# Altium PCB correctCore.PcbDoc (part 1 of 2)
Units mil, origin at the board's own origin, x right, y up, seen from the top; angles counter-clockwise.
Board outline 4175 x 4095 mil, 4 copper layers (Top Layer, GND, PWR, Bottom Layer), stack 43.711 mil thick; 90 components, 157 nets, 637 pads, 408 vias.
Unrouted connection lines stored in the file: 2.
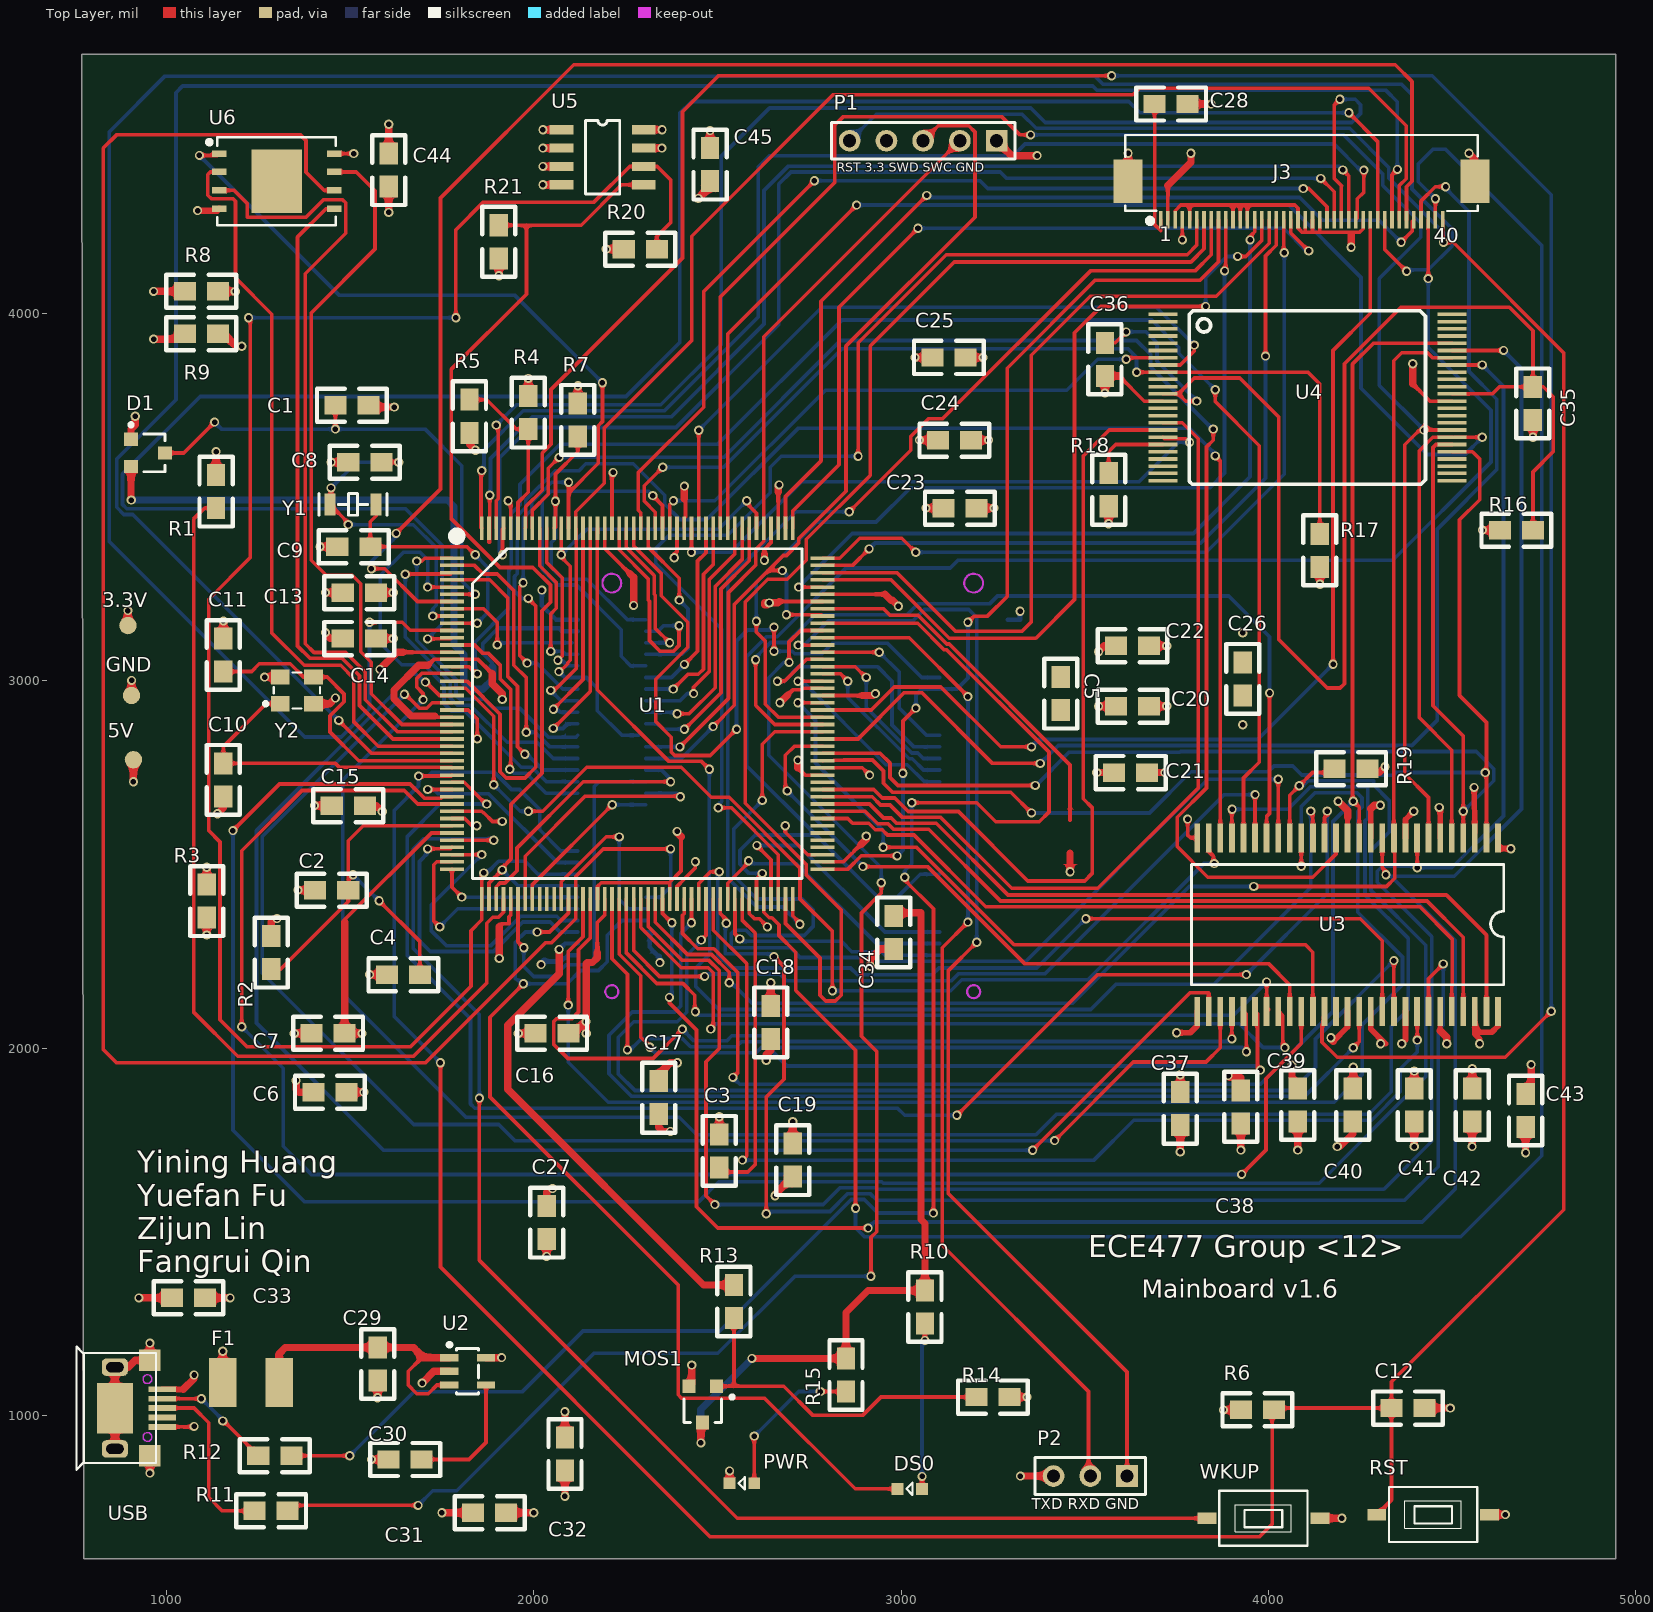
[diagram p0: Top Layer view]
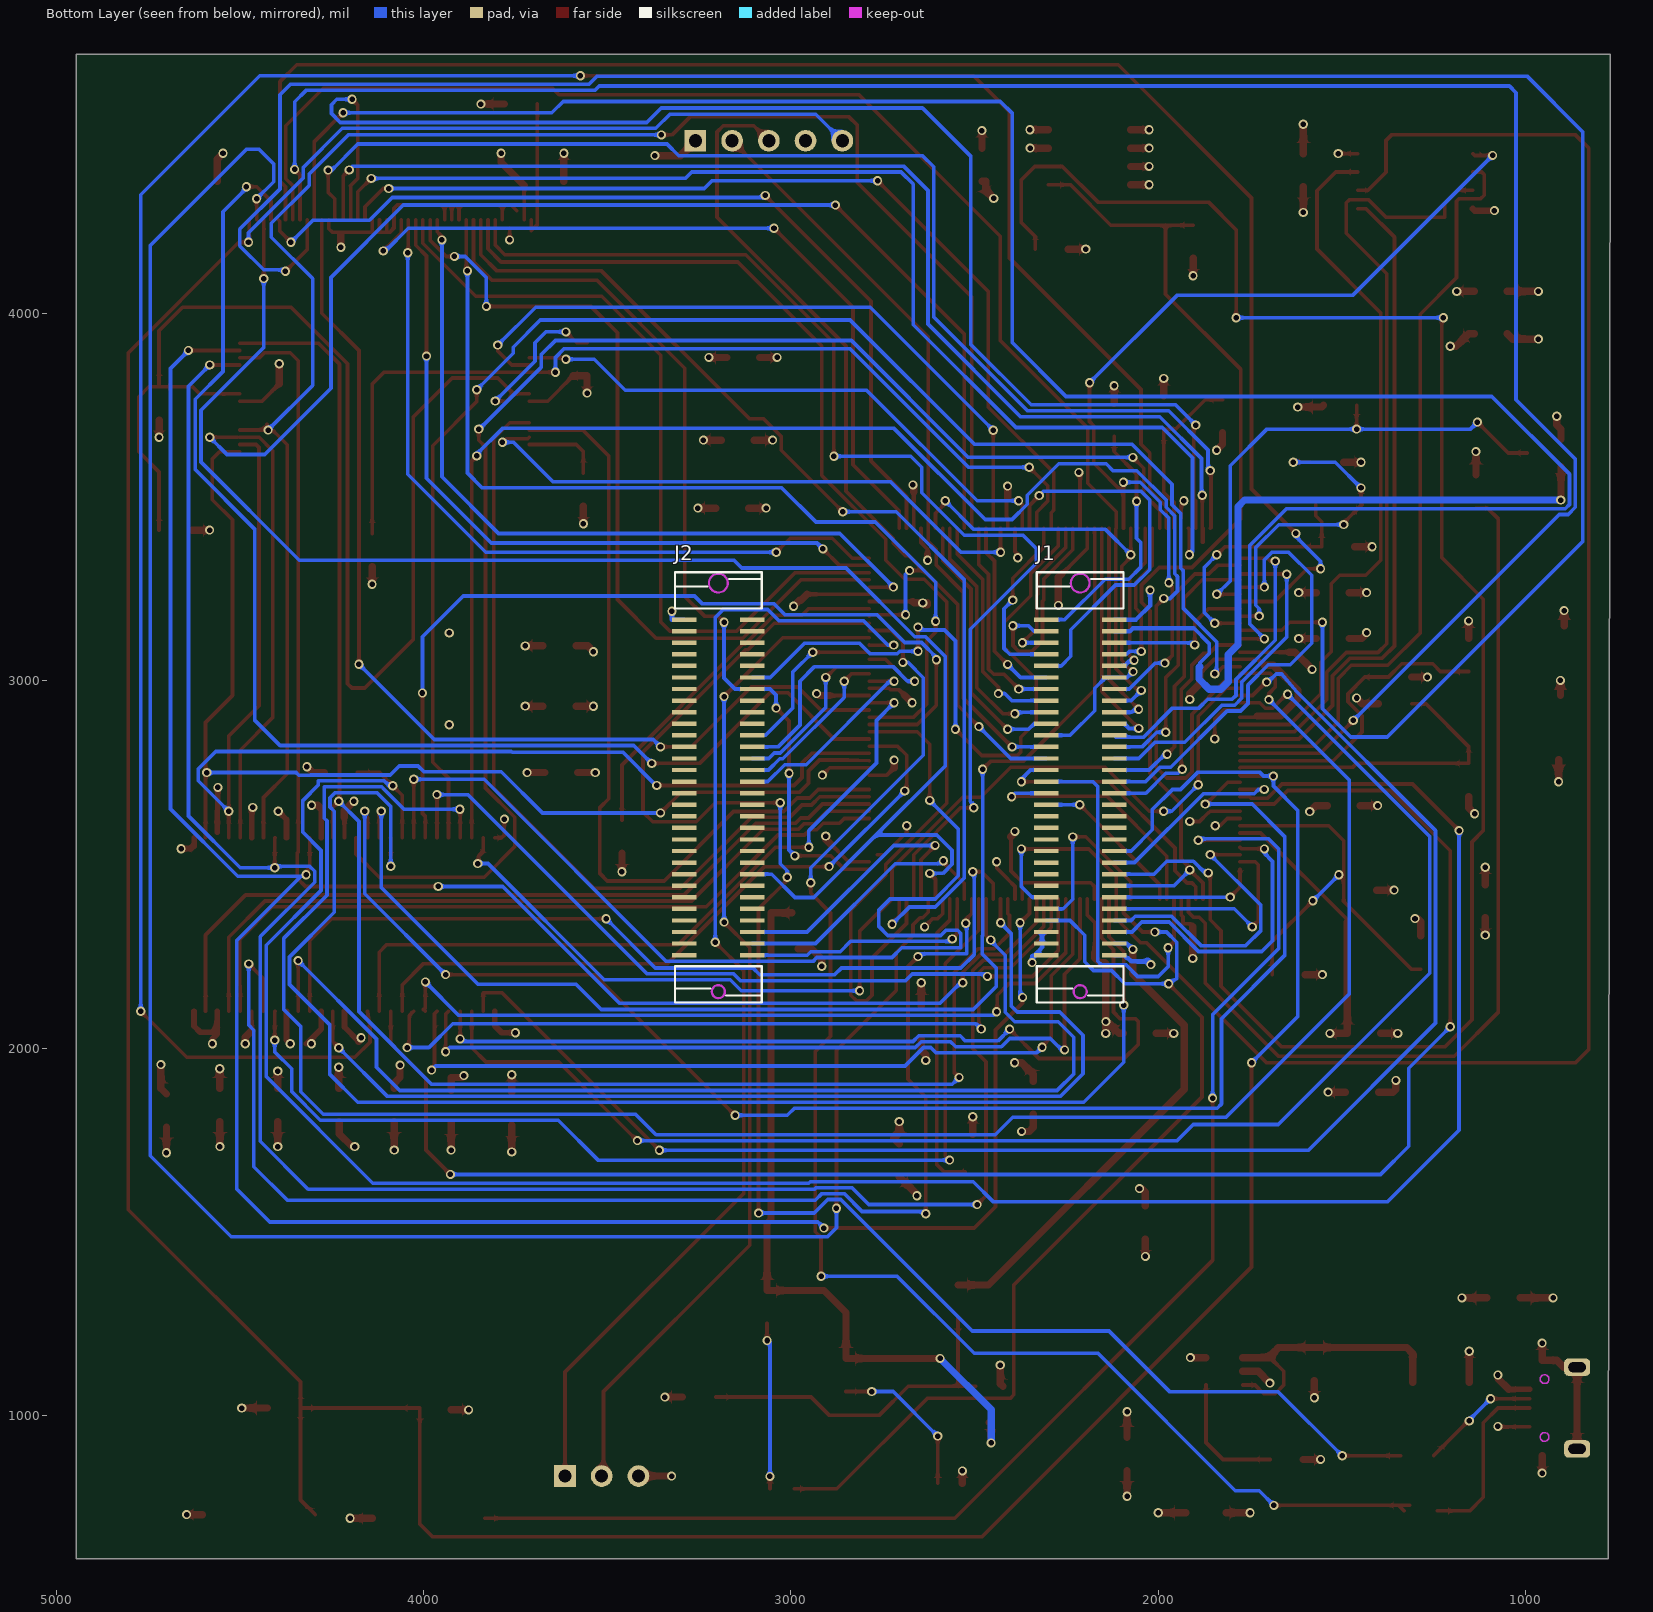
[diagram p1: Bottom Layer view, seen from below]
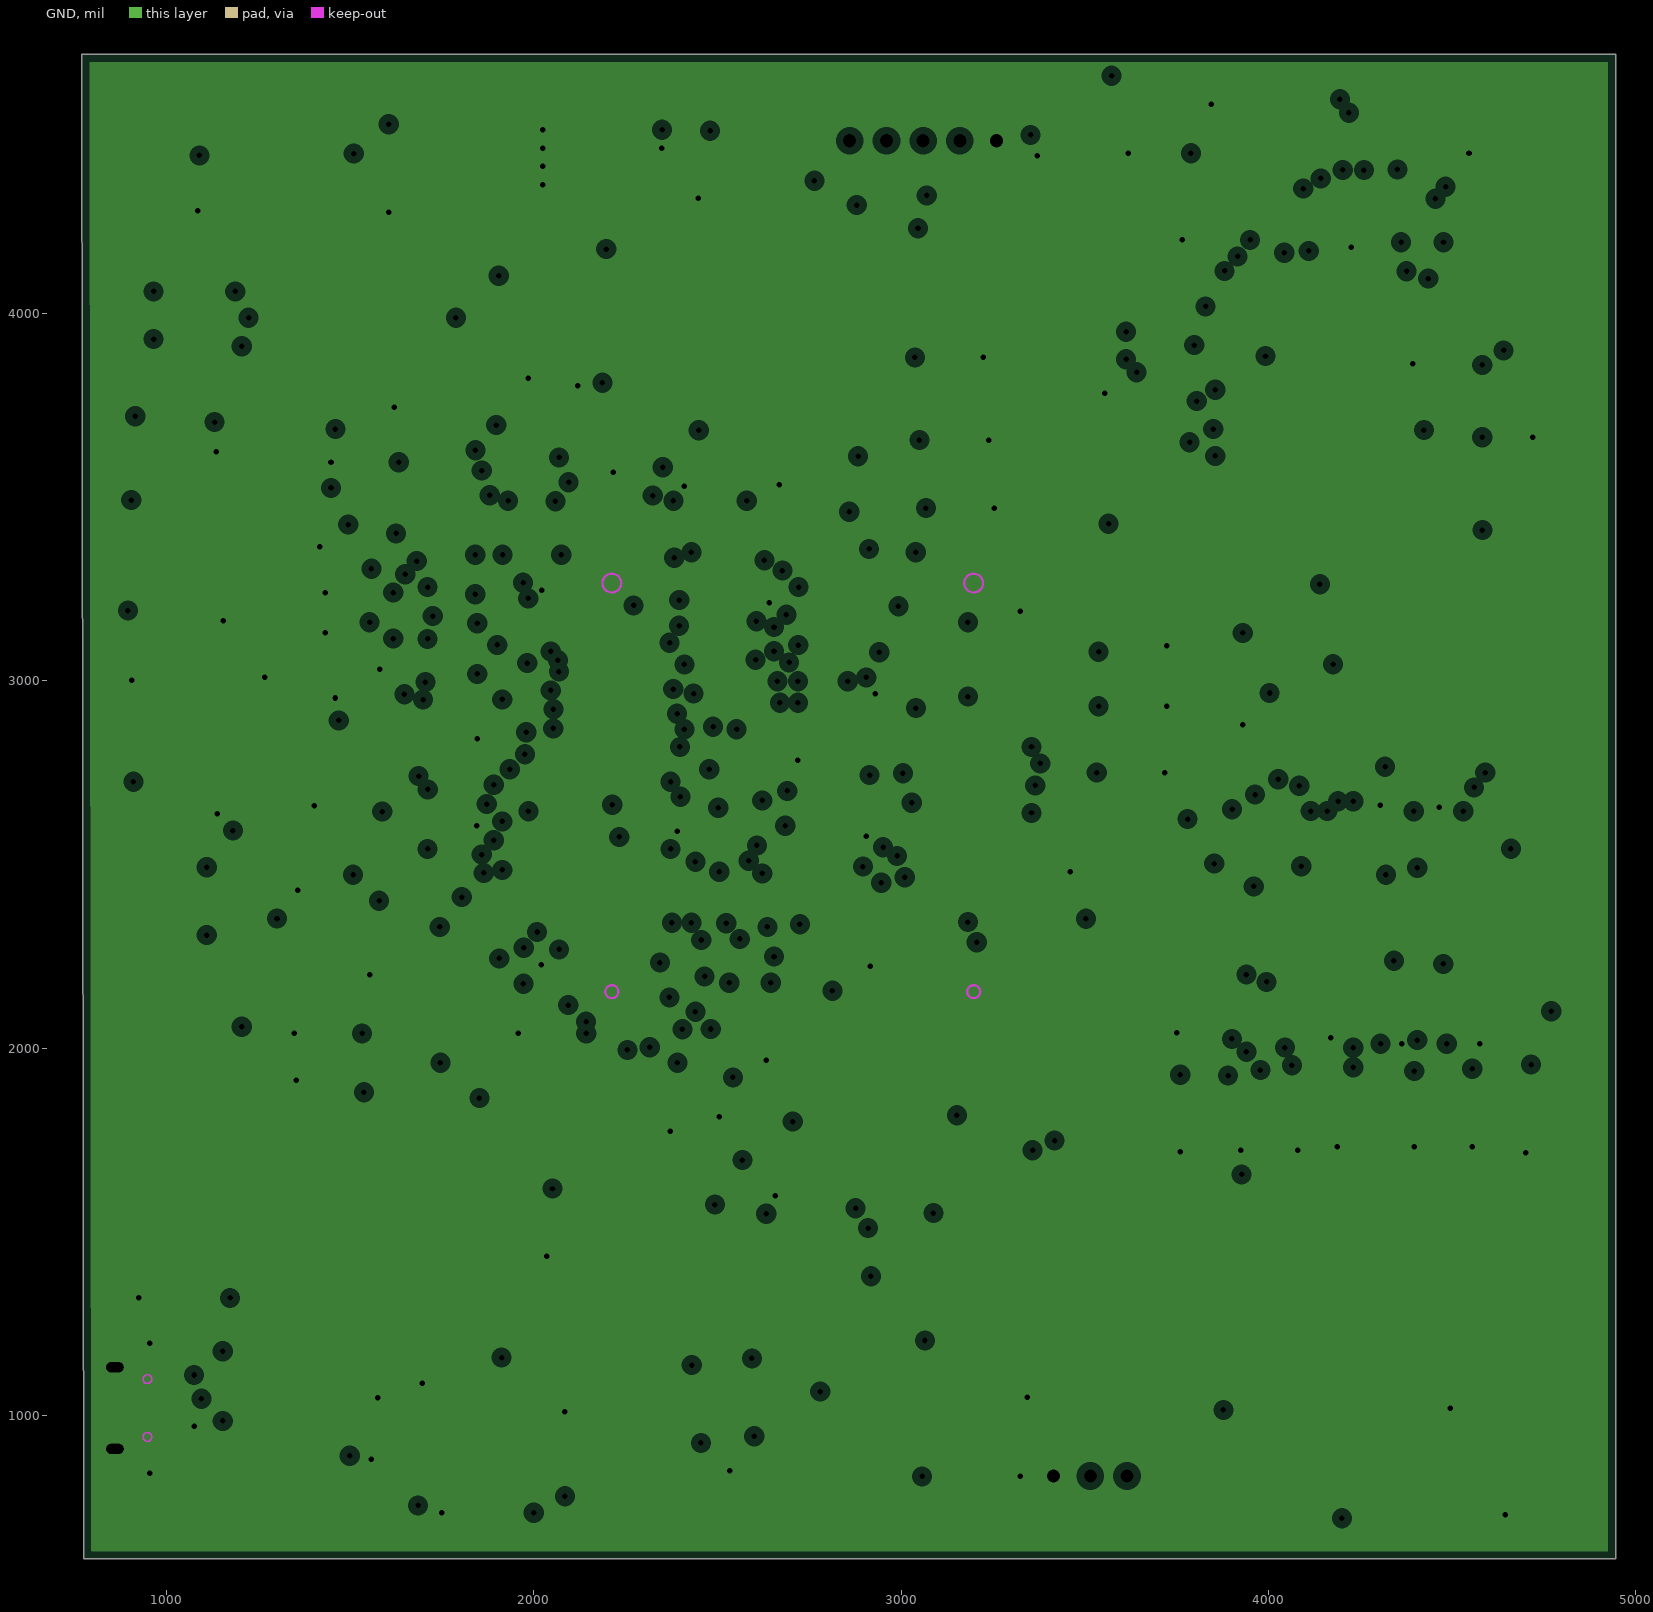
[diagram p2: GND, clearances drawn from the general rule]
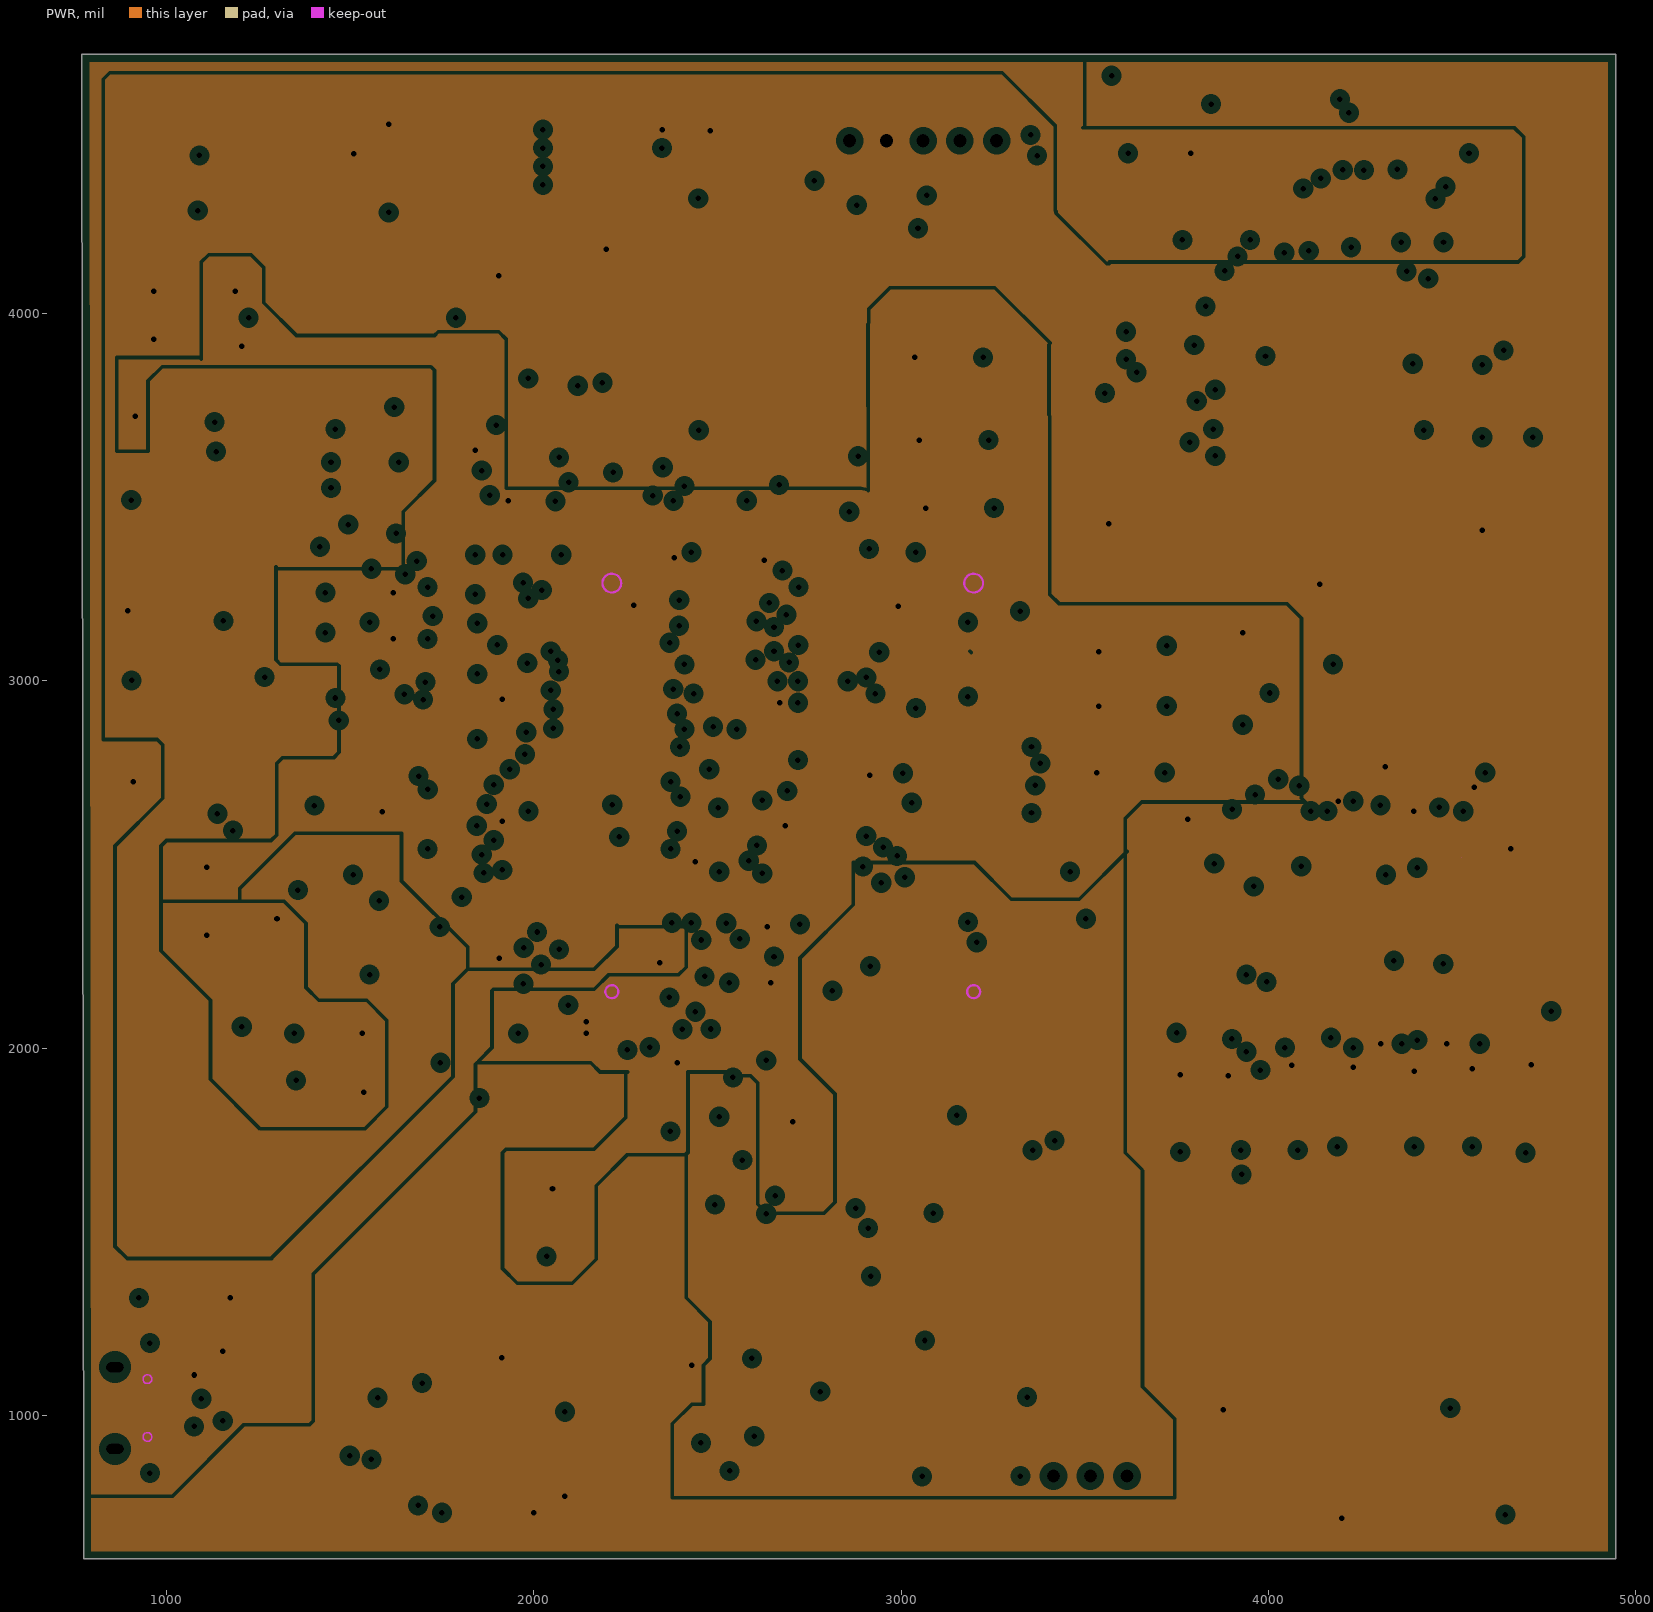
[diagram p3: PWR, clearances drawn from the general rule]

## Layer stack, top to bottom
Top Solder: solder mask 1, SM-001, Dk 4
Top Layer: signal copper 1.3778
Dielectric 1: prepreg 5.1, PP-017, Dk 4.3
GND: plane copper 1.3778, net GND
Dielectric 2: core 28, Core-039, Dk 4.8
PWR: plane copper 1.3778, net (Multiple Nets)
Dielectric 3: prepreg 5.1, PP-017, Dk 4.3
Bottom Layer: signal copper 1.3778
Bottom Solder: solder mask 1, SM-001, Dk 4

## Board outline
770,4705 4945,4705 4945,610 775,610
cut-out: 4525,2520

## Design rules (kind name [scope] priority, off if disabled: settings)
Clearance Clearance_1 [All] p1: gap=6 ignorepadtopadclearanceinfootprint=TRUE except(0: Arc-Hole Track-Hole SMDPad-Hole THPad-Hole Via-Hole Fill-Hole Poly-Hole Region-Hole Text-Hole)
Clearance Clearance_gnd [(InPolygon)] p2: gap=20 ignorepadtopadclearanceinfootprint=TRUE except(0: Arc-Hole Track-Hole SMDPad-Hole THPad-Hole Via-Hole Fill-Hole Poly-Hole Region-Hole Text-Hole)
ComponentClearance [All] p1 off: gap=10 collisioncheckmode=3 verticalgap=10 showdistances=FALSE
DiffPairsRouting [All] p1 off: maxlimit=10 minlimit=10 mostfreqgap=10 toplayer_minwidth=15 toplayer_maxwidth=15 toplayer_prefwidth=15 bottomlayer_minwidth=15 bottomlayer_maxwidth=15 bottomlayer_prefwidth=15 maxuncoupledlength=500
FanoutControl Fanout_BGA [IsBGA] p1 off: bgadir=Out bgaviamode=Centered fanoutstyle=Auto fanoutdirection=Alternating viagrid=1 // Fanout_BGA (Default Rule)
FanoutControl Fanout_LCC [IsLCC] p2 off: bgadir=Out bgaviamode=Centered fanoutstyle=Auto fanoutdirection=Alternating viagrid=1 // Fanout_LCC (Default Rule)
FanoutControl Fanout_SOIC [IsSOIC] p3 off: bgadir=Out bgaviamode=Centered fanoutstyle=Auto fanoutdirection=Alternating viagrid=1 // Fanout_SOIC (Default Rule)
FanoutControl Fanout_Small [(CompPinCount < 5)] p4 off: bgadir=Out bgaviamode=Centered fanoutstyle=Auto fanoutdirection=OutThenIn viagrid=1 // Fanout_Small (Default Rule)
FanoutControl Fanout_Default [All] p5 off: bgadir=Out bgaviamode=Centered fanoutstyle=Auto fanoutdirection=Alternating viagrid=1 // Fanout_Default (Default Rule)
Height [All] p1 off: minheight=0 maxheight=1000 prefheight=500
MinimumSolderMaskSliver MinimumSolderMaskSliver_pads [InPadClass('All Pads') vs InPadClass('All Pads')] p1: minsoldermaskwidth=0
MinimumSolderMaskSliver [All] p2: minsoldermaskwidth=10
ParallelSegment ParallelSegment_1 [InNetClass('fmc') vs InNetClass('fmc')] p1: limit=10000 gap=10
ParallelSegment ParallelSegment_2 [InNetClass('qspi') vs InNetClass('qspi')] p2: limit=10000 gap=10
ParallelSegment [InNetClass('dcmi') vs InNetClass('dcmi')] p3: limit=10000 gap=10
ParallelSegment ParallelSegment_3 [InNetClass('spi4') vs InNetClass('spi4')] p4: limit=10000 gap=10
PlaneClearance [All] p1: clearance=20
PlaneConnect PlaneConnect_power [InNetClass('power')] p1: pad.planeconnectstyle=Relief pad.reliefexpansion=20 pad.reliefentries=4 pad.reliefconductorwidth=10 pad.reliefairgap=10 via.planeconnectstyle=Direct via.reliefexpansion=20 via.reliefentries=4 via.reliefconductorwidth=10 via.reliefairgap=10
PlaneConnect PlaneConnect_gnd [InNetClass('gnd')] p2: pad.planeconnectstyle=Relief pad.reliefexpansion=10 pad.reliefentries=4 pad.reliefconductorwidth=10 pad.reliefairgap=10 via.planeconnectstyle=Direct via.reliefexpansion=20 via.reliefentries=4 via.reliefconductorwidth=10 via.reliefairgap=10
PolygonConnect [All] p1: connectstyle=Relief reliefconductorwidth=10 reliefentries=4 polygonreliefangle="90 Angle" airgapwidth=10
RoutingCorners [All] p1 off: cornerstyle=45-Degree minsetback=100 maxsetback=100
RoutingPriority [All] p1 off: routingpriority=0
RoutingTopology [All] p1 off: topology=Shortest
RoutingVias [All] p1: holewidth=15 width=25 viastyle="Through Hole" minholewidth=15 minwidth=25 maxholewidth=15 maxwidth=25
SMDNeckDown [All] p1: percent=100.000
SMDToCorner [All] p1: distance=0
SignalStimulus [All] p1: kind=1 level=0 starttime=10.00n stoptime=60.00n periodtime=100.0n
SilkToSilkClearance [All] p1: silktosilkclearance=0
SilkToSolderMaskClearance [IsPad] p1: minsilkscreentomaskgap=0 clearancetoexposedcopper=TRUE
SolderMaskExpansion [All] p1: expansion=4 useseparateexpansions=TRUE expansionbottom=4
SupplyNets SupplyNets_3.3m [InNet('VCC3.3M')] p1: voltage=3.300
SupplyNets SupplyNets_gnd [InNet('GND')] p2: voltage=0.000
SupplyNets SupplyNets_vcc [InNet('VCC3.3')] p3: voltage=3.300
SupplyNets SupplyNets_vcc5 [InNet('VCC3.3')] p4: voltage=5.000
Width gnd [InNetClass('gnd')] p1: maxlimit=20 minlimit=9 preferedwidth=20 minimp=50.000000 maximp=50.000000 favimp=50.000000
Width vccgnd [InNetClass('power')] p2: maxlimit=20 minlimit=9 preferedwidth=20 minimp=50.000000 maximp=50.000000 favimp=50.000000 checkconnectedcopper=TRUE
Width [All] p3: maxlimit=20 minlimit=9 preferedwidth=10 minimp=50.000000 maximp=50.000000 favimp=50.000000
14 further rules are at their usual default settings.

## Classes and differential pairs
net class gnd: GND
net class power: VBAT VCC3.3 VCC3.3M VCC5 VCC_LED VDDA VREF+
net class fmc: FMC_A0 FMC_A1 FMC_A2 FMC_A3 FMC_A4 FMC_A5 FMC_A6 FMC_A7 FMC_A8 FMC_A9 FMC_A10 FMC_A11 FMC_A12 FMC_A16_CLE FMC_A17_ALE FMC_BA0 FMC_BA1 FMC_D0 FMC_D1 FMC_D2 FMC_D3 FMC_D4 FMC_D5 FMC_D6 FMC_D7 FMC_D8 FMC_D9 FMC_D10 FMC_D11 FMC_D12 FMC_D13 FMC_D14 FMC_D15 FMC_NBL0 FMC_NBL1 FMC_NCE3 FMC_NE1 FMC_NOE FMC_NWAIT FMC_NWE FMC_SDCKE0 FMC_SDCLK FMC_SDNCAS FMC_SDNE0 FMC_SDNRAS FMC_SDNWE
net class spi4: PE2 PE4 PE5 PE6
net class qspi: PB2 PB6 PF6 PF7 PF8 PF9
net class dcmi: DCMI_D0 DCMI_D1 DCMI_D2 DCMI_D3 DCMI_D4 DCMI_D5 DCMI_D6 DCMI_D7 DCMI_HREF DCMI_PLCK DCMI_SCL DCMI_SDA DCMI_XCLK
component class stm: C1 C2 C3 C4 C5 C6 C7 C8 C9 C10 C11 C12 C13 C14 C15 C16 C17 C18 C19 C20 C21 C22 C23 C24 C25 C26 C27 D1 J1 J2 P1 R1 R2 R3 R4 R5 R6 R7 R8 R9 RST U1 Y1 Y2
component class mem: C35 C36 C37 C38 C39 C40 C41 C42 C43 C44 C45 R16 R17 R18 R19 R20 R21 U3 U4 U5 U6
component class circuit: 3.3V 5V C28 C29 C30 C31 C32 C33 C34 DS0 F1 GND J3 MOS1 P2 PWR R10 R11 R12 R13 R14 R15 U2 USB WKUP

## Components (designator, comment, footprint, x,y, rotation, side; value= is the part's Value field where it differs from the comment)
3.3V "TEST POINT" TP-1.5 895,3150 r90 top locked
5V "TEST POINT" TP-1.5 910,2785 r0 top locked
C1 "104" 0805 1460,3750.06 r0 top
C2 "104" 0805 1405,2430.06 r0 top
C3 "225" 0805 2504.94,1675 r90 top
C4 "225" 0805 1600,2200.06 r0 top
C5 "225" 0805 3435.06,3010 r270 top
C6 "10uF" 0805 1400,1880.06 r0 top
C7 "104" 0805 1395,2040.06 r0 top
C8 "6pF" 0805 1495,3595.06 r0 top
C9 "6pF" 0805 1465,3365.06 r0 top
C10 "22pF" 0805 1155,2685 r90 top
C11 "22pF" 0805 1155.06,3115 r270 top
C12 "104" 0805 4335,1020.06 r0 top
C13 "104" 0805 1480,3240.06 r0 top
C14 "104" 0805 1480,3115 r0 top
C15 "104" 0805 1450,2660.06 r0 top
C16 "104" 0805 2005,2040 r0 top
C17 "104" 0805 2339.94,1820 r90 top
C18 "104" 0805 2644.94,2025 r90 top
C19 "104" 0805 2704.94,1650 r90 top
C20 "104" 0805 3675,2930.51 r180 top
C21 "104" 0805 3670,2749.94 r180 top
C22 "104" 0805 3675,3094.94 r180 top
C23 "104" 0805 3205,3469.94 r180 top
C24 "104" 0805 3190,3654.94 r180 top
C25 "104" 0805 3175,3880 r180 top
C26 "104" 0805 3929.94,2960 r90 top
C27 "104" 0805 2034.94,1480 r90 top
C28 "104" 0805 3780,4570 r180 top
C29 "10uF" 0805 1574.94,1095 r90 top
C30 "103" 0805 1605,880.06 r0 top
C31 "104" 0805 1835,735.06 r0 top
C32 "10uF" 0805 2085.06,940 r270 top
C33 "104" 0805 1105,1319.94 r180 top
C34 "104" 0805 2980.06,2360 r270 top
C35 "104" 0805 4719.94,3710 r90 top
C36 "104" 0805 3554.94,3830 r90 top
C37 "104" 0805 3760,1790 r90 top
C38 "104" 0805 3924.94,1795 r90 top
C39 "104" 0805 4079.94,1800 r90 top
C40 "104" 0805 4229.94,1800 r90 top
C41 "104" 0805 4396.9,1800 r90 top
C42 "104" 0805 4554.39,1800 r90 top
C43 "104" 0805 4699.94,1785 r90 top
C44 "104" 0805 1605.06,4435 r270 top
C45 "104" 0805 2480,4450 r270 top
D1 "BAT54C" SOT-23 945,3620 r270 top
DS0 "LED" SMDLED-0603 3056.93,800 r180 top
F1 "1812L075PR" *1812 1230,1090 r0 top
GND "TEST POINT" TP-1.5 905,2960 r90 top locked
J1 "3710M060046G3FT01" 3710F060046G3FT01 2305,2253 r0 bottom
J2 "3710M060046G3FT01" 3710F060046G3FT01 3290,2253 r0 bottom
J3 "RGBLCD" FPC-TOP40 3706.61,4251 r0 top
MOS1 "SI2301" SO-G3/C2.5 2460,1030 r180 top
P1 "SWD" HDR1X5 3260,4470 r180 top
P2 "USART1" HDR1X3 3615,835 r180 top
PWR "LED" SMDLED-0603 2600,815 r180 top
R1 "10K" 0805 1134.94,3470 r90 top
R2 "10R" 0805 1284.94,2215 r90 top
R3 "10R" 0805 1109.94,2355 r90 top
R4 "0R" 0805 1984.94,3685 r90 top
R5 "0R" 0805 1825.06,3765 r270 top
R6 "10K" 0805 4015,1014.94 r180 top
R7 "100K" 0805 2119.94,3665 r90 top
R8 "0R" 0805 1050,4060.06 r0 top
R9 "0R" 0805 1050,3945 r0 top
R10 "1K" 0805 3065,1340 r270 top
R11 "10R" 0805 1330,740 r180 top
R12 "10R" 0805 1340,890 r180 top
R13 "10R" 0805 2545.06,1355 r270 top
R14 "100K" 0805 3295,1049.94 r180 top
R15 "1K" 0805 2849.94,1065 r90 top
R16 "0R" 0805 4720,3409.94 r180 top
R17 "10K" 0805 4139.94,3310 r90 top
R18 "10K" 0805 3565.06,3565 r270 top
R19 "10K" 0805 4270,2759.94 r180 top
R20 "4.7K" 0805 2335,4175 r180 top
R21 "4.7K" 0805 1905,4240 r270 top
RST "KEY_M" KEY_SOP3625 4295,730 r0 top
U1 "STM32F767IGT6" LQFP176 1777.18,3333.68 r0 top
U2 "CAT6219-330TD" SOT-23-5 1770,1157.4 r0 top
U3 "W9825G6KH" TSOP54 4624.92,2572.44 r270 top
U4 "MT29F4G08" TSOP48 3712.6,3997.48 r0 top
U5 "24C02" SOP-8 2075,4500 r0 top
U6 "W25Q256" WSON8 1300,4360 r0 top
USB "USB-AB" "USB_AB - 5S - B" 775,1020 r90 top
WKUP "KEY_UP" KEY_SOP3625 3832.91,720 r0 top
Y1 "32.768KHz" XTAL3215 1445,3480 r0 top
Y2 "25Mhz" XTAL3225 1310,2937.17 r0 top

## Footprints (in the part's own frame and the unit in brackets; to place one, negate y for a bottom-side part, rotate by r counter-clockwise, add the part's x,y. Pads: shape width x height; smd on the part's side, far side on the other; paste and mask are expansions set on the pad)
0805 [mil]
  rect 60x50 smd: 1(0,-0.06) 2(90,-0.06)
  silkscreen extent -50,-45 140,45
3710F060046G3FT01 [mm]
  rect 1.7x0.3 smd: 1(-4.7,0) 2(-4.7,-0.8) 3(-4.7,-1.6) 4(-4.7,-2.4) 5(-4.7,-3.2) 6(-4.7,-4) 7(-4.7,-4.8) 8(-4.7,-5.6) 9(-4.7,-6.4) 10(-4.7,-7.2) 11(-4.7,-8) 12(-4.7,-8.8) 13(-4.7,-9.6) 14(-4.7,-10.4) 15(-4.7,-11.2) 16(-4.7,-12) 17(-4.7,-12.8) 18(-4.7,-13.6) 19(-4.7,-14.4) 20(-4.7,-15.2) 21(-4.7,-16) 22(-4.7,-16.8) 23(-4.7,-17.6) 24(-4.7,-18.4) 25(-4.7,-19.2) 26(-4.7,-20) 27(-4.7,-20.8) 28(-4.7,-21.6) 29(-4.7,-22.4) 30(-4.7,-23.2) 31(0,-23.2) 32(0,-22.4) 33(0,-21.6) 34(0,-20.8) 35(0,-20) 36(0,-19.2) 37(0,-18.4) 38(0,-17.6) 39(0,-16.8) 40(0,-16) 41(0,-15.2) 42(0,-14.4) 43(0,-13.6) 44(0,-12.8) 45(0,-12) 46(0,-11.2) 47(0,-10.4) 48(0,-9.6) 49(0,-8.8) 50(0,-8) 51(0,-7.2) 52(0,-6.4) 53(0,-5.6) 54(0,-4.8) 55(0,-4) 56(0,-3.2) 57(0,-2.4) 58(0,-1.6) 59(0,-0.8) 60(0,0)
  Keep-Out Layer circle w0.152: c-2.35,2.525 r0.45
  Keep-Out Layer circle w0.152: c-2.35,-25.725 r0.65
  silkscreen extent -5.35,-26.48 0.65,3.27
*1812 [mm]
  rect 1.9x3.4 smd: 1(-1.95,0) 2(1.95,0)
FPC-TOP40 [mm]
  rect 0.25x1.2 smd: 1(0,0.102) 2(0.5,0.102) 3(1,0.102) 4(1.5,0.102) 5(2,0.102) 6(2.5,0.102) 7(3,0.102) 8(3.5,0.102) 9(4,0.102) 10(4.5,0.102) 11(5,0.102) 12(5.5,0.102) 13(6,0.102) 14(6.5,0.102) 15(7,0.102) 16(7.5,0.102) 17(8,0.102) 18(8.5,0.102) 19(9,0.102) 20(9.5,0.102) 21(10,0.102) 22(10.5,0.102) 23(11,0.102) 24(11.5,0.102) 25(12,0.102) 26(12.5,0.102) 27(13,0.102) 28(13.5,0.102) 29(14,0.102) 30(14.5,0.102) 31(15,0.102) 32(15.5,0.102) 33(16,0.102) 34(16.5,0.102) 35(17,0.102) 36(17.5,0.102) 37(18,0.102) 38(18.5,0.102) 39(19,0.102) 40(19.5,0.102)
  rect 2x3 smd: A(-2.25,2.754) B(21.725,2.754)
  silkscreen extent -2.45,-0.15 21.92,5.97
HDR1X3 [mm]
  rect 1.5x1.5 hole 0.9: 1(0,0)
  round 1.5 hole 0.9: 2(2.54,0) 3(5.08,0)
  silkscreen extent -1.27,-1.27 6.35,1.27
HDR1X5 [mm]
  rect 1.5x1.5 hole 0.9: 1(0,0)
  round 1.5 hole 0.9: 2(2.54,0) 3(5.08,0) 4(7.62,0) 5(10.16,0)
  silkscreen extent -1.27,-1.27 11.43,1.27
KEY_SOP3625 [mm]
  rect 1.3x0.8 smd: 1(0,0) 2(7.8,0)
  silkscreen extent 0.85,-1.9 6.95,1.9
LQFP176 [mm]
  rect 1.65x0.254 smd: 1(0,0) 2(0,-0.5) 3(0,-1) 4(0,-1.5) 5(0,-2) 6(0,-2.5) 7(0,-3) 8(0,-3.5) 9(0,-4) 10(0,-4.5) 11(0,-5) 12(0,-5.5) 13(0,-6) 14(0,-6.5) 15(0,-7) 16(0,-7.5) 17(0,-8) 18(0,-8.5) 19(0,-9) 20(0,-9.5) 21(0,-10) 22(0,-10.5) 23(0,-11) 24(0,-11.5) 25(0,-12) 26(0,-12.5) 27(0,-13) 28(0,-13.5) 29(0,-14) 30(0,-14.5) 31(0,-15) 32(0,-15.5) 33(0,-16) 34(0,-16.5) 35(0,-17) 36(0,-17.5) 37(0,-18) 38(0,-18.5) 39(0,-19) 40(0,-19.5) 41(0,-20) 42(0,-20.5) 43(0,-21) 44(0,-21.5) 89(25.631,-21.5) 90(25.631,-21) 91(25.631,-20.5) 92(25.631,-20) 93(25.631,-19.5) 94(25.631,-19) 95(25.631,-18.5) 96(25.631,-18) 97(25.631,-17.5) 98(25.631,-17) 99(25.631,-16.5) 100(25.631,-16) 101(25.631,-15.5) 102(25.631,-15) 103(25.631,-14.5) 104(25.631,-14) 105(25.631,-13.5) 106(25.631,-13) 107(25.631,-12.5) 108(25.631,-12) 109(25.631,-11.5) 110(25.631,-11) 111(25.631,-10.5) 112(25.631,-10) 113(25.631,-9.5) 114(25.631,-9) 115(25.631,-8.5) 116(25.631,-8) 117(25.631,-7.5) 118(25.631,-7) 119(25.631,-6.5) 120(25.631,-6) 121(25.631,-5.5) 122(25.631,-5) 123(25.631,-4.5) 124(25.631,-4) 125(25.631,-3.5) 126(25.631,-3) 127(25.631,-2.5) 128(25.631,-2) 129(25.631,-1.5) 130(25.631,-1) 131(25.631,-0.5) 132(25.631,0)
  rect 0.254x1.65 smd: 45(2.065,-23.566) 46(2.566,-23.566) 47(3.066,-23.566) 48(3.565,-23.566) 49(4.066,-23.566) 50(4.565,-23.566) 51(5.066,-23.566) 52(5.565,-23.566) 53(6.066,-23.566) 54(6.565,-23.566) 55(7.066,-23.566) 56(7.565,-23.566) 57(8.066,-23.566) 58(8.565,-23.566) 59(9.066,-23.566) 60(9.565,-23.566) 61(10.066,-23.566) 62(10.565,-23.566) 63(11.066,-23.566) 64(11.565,-23.566) 65(12.066,-23.566) 66(12.565,-23.566) 67(13.066,-23.566) 68(13.565,-23.566) 69(14.066,-23.566) 70(14.565,-23.566) 71(15.066,-23.566) 72(15.566,-23.566) 73(16.066,-23.566) 74(16.566,-23.566) 75(17.065,-23.566) 76(17.566,-23.566) 77(18.065,-23.566) 78(18.566,-23.566) 79(19.065,-23.566) 80(19.566,-23.566) 81(20.065,-23.566) 82(20.566,-23.566) 83(21.065,-23.566) 84(21.566,-23.566) 85(22.065,-23.566) 86(22.566,-23.566) 87(23.065,-23.566) 88(23.566,-23.566) 133(23.566,2.065) 134(23.065,2.065) 135(22.566,2.065) 136(22.065,2.065) 137(21.566,2.065) 138(21.065,2.065) 139(20.566,2.065) 140(20.065,2.065) 141(19.566,2.065) 142(19.065,2.065) 143(18.566,2.065) 144(18.065,2.065) 145(17.566,2.065) 146(17.065,2.065) 147(16.566,2.065) 148(16.066,2.065) 149(15.566,2.065) 150(15.066,2.065) 151(14.565,2.065) 152(14.066,2.065) 153(13.565,2.065) 154(13.066,2.065) 155(12.565,2.065) 156(12.066,2.065) 157(11.565,2.065) 158(11.066,2.065) 159(10.565,2.065) 160(10.066,2.065) 161(9.565,2.065) 162(9.066,2.065) 163(8.565,2.065) 164(8.066,2.065) 165(7.565,2.065) 166(7.066,2.065) 167(6.565,2.065) 168(6.066,2.065) 169(5.565,2.065) 170(5.066,2.065) 171(4.565,2.065) 172(4.066,2.065) 173(3.565,2.065) 174(3.066,2.065) 175(2.566,2.065) 176(2.065,2.065)
  silkscreen extent 0.04,-22.15 24.22,1.82
SMDLED-0603 [mil]
  rect 32x32 smd: 1(0,0) 2(66.93,0)
  silkscreen extent 26,-17 42,17
SO-G3/C2.5 [mm]
  rect 0.9x0.95 smd: 1(-0.95,-1.25) 2(0.95,-1.25) 3(0,1.25)
  silkscreen extent -2.16,-0.63 1.3,1.25
SOP-8 [mil]
  rect 65x25 smd: 1(0,0) 2(0,-50) 3(0,-100) 4(0,-150) 5(224.41,-150) 6(224.41,-100) 7(224.41,-50) 8(224.41,0)
  silkscreen extent 65,-175 159,25
SOT-23 [mm]
  rect 0.9x0.95 smd: 1(-0.95,-1.048) 2(0.95,-1.048) 3(0,1.302)
  silkscreen extent -2.07,-1.17 1.3,1.3
SOT-23-5 [mil]
  rect 50x20 smd: 1(0,0) 2(0,-37.4) 3(0,-74.8) 4(100,-74.8) 5(100,0)
  silkscreen extent 0,-99 80,35
TP-1.5 [mm]
  round 1.2 smd: 1(0,0)
TSOP48 [mm]
  rect 2x0.25 smd: 1(0,0) 2(0,-0.5) 3(0,-1) 4(0,-1.5) 5(0,-2) 6(0,-2.5) 7(0,-3) 8(0,-3.5) 9(0,-4) 10(0,-4.5) 11(0,-5) 12(0,-5.5) 13(0,-6) 14(0,-6.5) 15(0,-7) 16(0,-7.5) 17(0,-8) 18(0,-8.5) 19(0,-9) 20(0,-9.5) 21(0,-10) 22(0,-10.5) 23(0,-11) 24(0,-11.5) 25(20,-11.5) 26(20,-11) 27(20,-10.5) 28(20,-10) 29(20,-9.5) 30(20,-9) 31(20,-8.5) 32(20,-8) 33(20,-7.5) 34(20,-7) 35(20,-6.5) 36(20,-6) 37(20,-5.5) 38(20,-5) 39(20,-4.5) 40(20,-4) 41(20,-3.5) 42(20,-3) 43(20,-2.5) 44(20,-2) 45(20,-1.5) 46(20,-1) 47(20,-0.5) 48(20,0)
  silkscreen extent 1.83,-11.75 18.17,0.25
TSOP54 [mm]
  rect 2x0.4 smd: 1(0,0) 2(0,-0.8) 3(0,-1.6) 4(0,-2.4) 5(0,-3.2) 6(0,-4) 7(0,-4.8) 8(0,-5.6) 9(0,-6.4) 10(0,-7.2) 11(0,-8) 12(0,-8.8) 13(0,-9.6) 14(0,-10.4) 15(0,-11.2) 16(0,-12) 17(0,-12.8) 18(0,-13.6) 19(0,-14.4) 20(0,-15.2) 21(0,-16) 22(0,-16.8) 23(0,-17.6) 24(0,-18.4) 25(0,-19.2) 26(0,-20) 27(0,-20.8) 28(12,-20.8) 29(12,-20) 30(12,-19.2) 31(12,-18.4) 32(12,-17.6) 33(12,-16.8) 34(12,-16) 35(12,-15.2) 36(12,-14.4) 37(12,-13.6) 38(12,-12.8) 39(12,-12) 40(12,-11.2) 41(12,-10.4) 42(12,-9.6) 43(12,-8.8) 44(12,-8) 45(12,-7.2) 46(12,-6.4) 47(12,-5.6) 48(12,-4.8) 49(12,-4) 50(12,-3.2) 51(12,-2.4) 52(12,-1.6) 53(12,-0.8) 54(12,0)
  silkscreen extent 1.83,-21.2 10.16,0.4
"USB_AB - 5S - B" [mm]
  rect 0.4x1.9 smd: 1(1.3,-5.436) 2(0.65,-5.436) 3(0,-5.436) 4(-0.65,-5.436) 5(-1.3,-5.436)
  rrect50% 1.2x1.8 hole 0.7 slot 1.2 at 90 deg: 6(2.825,-2.15) 7(-2.825,-2.15)
  rect 1.5x1.5 smd: 8(-3.302,-4.572) 9(3.302,-4.572)
  rect 3.5x2.5 smd: 9(0,-2.159)
  Keep-Out Layer circle w0.102: c-2,-4.4 r0.3
  Keep-Out Layer circle w0.102: c2,-4.4 r0.3
  silkscreen extent -4.26,-5 4.26,0.51
WSON8 [mm]
  rect 1x0.45 smd: 1(-3.975,1.905) 2(-3.975,0.635) 3(-3.975,-0.635) 4(-3.975,-1.905) 5(3.975,-1.905) 6(3.975,-0.635) 7(3.975,0.635) 8(3.975,1.905)
  rect 3.5x4.4 smd: 9(0,0)
  silkscreen extent -4.8,-3.05 4.1,3.05
XTAL3215 [mm]
  rect 0.75x1.5 smd: 1(0,0) 2(3.2,0)
  silkscreen extent -0.74,-0.75 3.94,0.75
XTAL3225 [mm]
  rect 1.3x1.05 smd: 1(0,0) 2(2.3,0) 3(2.3,1.85) 4(0,1.85)
  silkscreen extent -1.14,-0.33 2.74,2.17

## Part data
3.3V 5V GND: library part TEST-POINT, "测试点"
C1 C2 C3 C4 C5 C6 C7 C8 C9 C10 C11 C12 C13 C14 C15 C16 C17 C18 C19 C20 C21 C22 C23 C24 C25 C26 C27 C28 C29 C30 C31 C32 C33 C34 C35 C36 C37 C38 C39 C40 C41 C42 C43 C44 C45: library part C
D1: "双肖特基二极管"
F1: "PTC Resettable Fuse 0.75A_hold_ 1.5A_trip_ 13.2VDC 100A 0.8W 0.2s 0.1Ohm SMD Solder Pad 1812 T/R", Package="1812 Littelfuse", Availability=Unavailable, MF="Littelfuse Inc.", MP=1812L075PR, Price=None, SnapEDA_Link=https://www.snapeda.com/parts/1812L075PR/Littelfuse%20Inc./view-part/?ref=snap
J1 J2: library part 3710F, "3710F060046G3FT01"
J3: library part FPC-40, "FPC-40P-0.5mm"
MOS1: library part MOS-P, "IRLML6401/SI2301"
P1: library part "Header 5", "Header, 5-Pin", LatestRevisionDate=17-Jul-2002, LatestRevisionNote="Re-released for DXP Platform.", Publisher="Altium Limited"
P2: library part "Header 3", "Header, 3-Pin", LatestRevisionDate=17-Jul-2002, LatestRevisionNote="Re-released for DXP Platform.", Publisher="Altium Limited"
R1 R2 R3 R4 R5 R6 R7 R8 R9 R10 R11 R12 R13 R14 R15 R16 R17 R18 R19 R20 R21: library part R
U2: "3.3V 500mA LDO"
U3: library part IS42S16160B, "32MB SDRAM"
U4: library part K9F2G08U0C, "256MB NAND FLASH"
U5: library part 24C256, "EEPROM"
U6: library part W25Q128, "W25Q128"
USB: "MicroUSB"
WKUP: library part KEY_M
Y1: library part XTAL, "普通晶振"
Y2: library part XTAL_3225, "3225贴片无源晶振"

## Via types
v1: diameter 25, hole 15, Top Layer to Bottom Layer, tented both sides, 408 vias

## Nets (pads, with @x,y where several pads share a name; then routed paths per layer and width w, separated by ;. In a path a pad name is that pad's centre, name@x,y a point inside that pad or via, vN(x,y) a via of type N, cw(c..) or ccw(c..) an arc to the next point about the centre after c; other vN are vias at no path point)
BOOT0: J1.31 R7.1 U1.166 | length 777.3
  Top Layer w10: U1.166@2055.35,3415 2059.04,3418.68 v1(2059.04,3488.61) 2059.04,3562.68 2120,3623.65 R7.1@2120,3665
  Bottom Layer w10: v1(2059.04,3488.61) 2059.04,3388.04 2048,3377 2048,3308.5 2080,3276.5 2144.5,3276.5 2254.61,3166.39 J1.31@2305,3166.39
DCMI_D0: J2.16 U1.115 | length 569
  Top Layer w10: v1(2719,2998.66) 2722.31,3001.97 2725.24,2999.04 U1.115@2786.28,2999.04
  Bottom Layer w10: v1(2719,2998.66) 2731.34,2998.66 2958.5,2771.5 3017,2771.5 3063.06,2725.44 J2.16@3104.96,2725.44
DCMI_D1: J2.17 U1.116 | length 452.9
  Top Layer w10: U1.116@2786.28,3018.72 2834.93,3018.72 v1(2855,2998.66)
  Bottom Layer w10: v1(2855,2998.66) 2855,2954.67 3022.17,2787.5 3030.44,2787.5 3061,2756.94 J2.17@3104.96,2756.94
DCMI_D2: J2.18 U1.117 | length 470
  Top Layer w10: U1.117@2786.28,3038.41 2875.5,3038.41 v1(2905,3008.9)
  Bottom Layer w10: v1(2905,3008.9) 2905,2927.3 3028.8,2803.5 3045.43,2803.5 3060.5,2788.43 J2.18@3104.96,2788.43
DCMI_D3: J2.19 U1.118 | length 766.3
  Top Layer w10: v1(2663.18,2998.66) 2682.32,2998.66 2741.75,3058.09 U1.118@2786.28,3058.09
  Bottom Layer w10: v1(2663.18,2998.66) 2682.32,2998.66 2722.16,3038.5 2935.5,3038.5 2975.34,2998.66 2975.34,2879.58 3035,2819.93 J2.19@3104.96,2819.93
DCMI_D4: J1.39 U1.140 | length 684.5
  Top Layer w10: v1(2390,2910) 2422.87,2910 2493.87,2981 2493.87,3256.83 2567.16,3330.12 U1.140@2567.16,3415
  Bottom Layer w10: J1.39@2305,2914.42 2385.58,2914.42 v1(2390,2910)
DCMI_D5: J1.36 U1.145 | length 514.7
  Top Layer w10: v1(2410.28,3044.49) 2445.87,3080.08 2445.87,3325.81 2468.74,3348.68 U1.145@2468.74,3415
  Bottom Layer w10: J1.36@2305,3008.91 2374.69,3008.91 v1(2410.28,3044.49)
DCMI_D6: J1.26 U1.167 | length 441.8
  Top Layer w10: U1.167@2035.67,3415 2035.67,3322 2077.5,3280.17 2077.5,3067.56 v1(2065.84,3055.91)
  Bottom Layer w10: v1(2065.84,3055.91) 2076.5,3055.91 2092,3040.4 J1.26@2119.96,3040.4
DCMI_D7: J1.27 U1.168 | length 437.6
  Top Layer w10: U1.168@2015.98,3415 2015.98,3313.02 2061.5,3267.5 2061.5,3197.5 2046,3182 v1(2046,3079.9)
  Bottom Layer w10: v1(2046,3079.9) 2078.44,3079.9 2086.45,3071.9 J1.27@2119.96,3071.9
DCMI_HREF: J2.3 U1.85 | length 756.7
  Top Layer w10: v1(2607.37,2551.5) 2645.9,2512.97 U1.85@2645.9,2405.91
  Bottom Layer w10: v1(2607.37,2551.5) 2720.35,2551.5 2955.86,2315.99 J2.3@3104.96,2315.99
DCMI_PLCK: J1.47 U1.52 | length 438.1
  Top Layer w10: U1.52@1996.3,2405.91 1996.3,2445.32 v1(2213.43,2662.45)
  Bottom Layer w10: v1(2213.43,2662.45) J1.47@2305,2662.45
DCMI_RESET: J1.25 J1.41 U1.138 U1.165 | length 1390.3
  Top Layer w10: v1(2068.5,3024.91) 2076.16,3032.56 2078.78,3032.56 2092.55,3046.33 2092.55,3048.95 2099.39,3055.79 2099.39,3311.59 2075.04,3335.94 v1(2075.04,3343.21) U1.165@2075.04,3415 ; v1(2580,3490) 2580,3482.53 2606.53,3456 U1.138@2606.53,3415
  Bottom Layer w10: v1(2068.5,3024.91) 2084.5,3008.91 J1.25@2119.96,3008.91 2143.39,3008.91 2172.89,2979.41 2172.89,2918.54 2240,2851.43 J1.41@2285,2851.43 ; v1(2075.04,3343.21) 2143.83,3412 2502,3412 v1(2580,3490)
DCMI_SCL: J1.22 U1.162 | length 596
  Top Layer w10: v1(2053.34,2922.42) 2134.09,3003.18 U1.162@2134.09,3415
  Bottom Layer w10: v1(2053.34,2922.42) 2064,2922.42 2072,2914.42 J1.22@2119.96,2914.42
DCMI_SDA: J1.21 U1.161 | length 659.3
  Top Layer w10: v1(2052.81,2870) 2153.78,2970.97 U1.161@2153.78,3415
  Bottom Layer w10: v1(2052.81,2870) 2079.47,2870 2092.39,2882.92 J1.21@2119.96,2882.92
DCMI_XCLK: J2.20 U1.119 | length 469.7
  Top Layer w10: U1.119@2786.28,3077.78 v1(2940.6,3077.78)
  Bottom Layer w10: v1(2940.6,3077.78) 2994.64,3023.73 2994.64,2925.93 3069.14,2851.42 J2.20@3104.96,2851.42
ETH_MDC: J1.9 U1.33 | length 556.5
  Top Layer w10: v1(1711.6,2704) 1776.94,2704 U1.33@1777.18,2703.76
  Bottom Layer w10: v1(1711.6,2704) 1727,2704 1738.3,2692.7 1876.88,2692.7 2064.61,2504.97 J1.9@2119.96,2504.97
ETH_MDIO: J1.4 U1.42 | length 799.1
  Top Layer w10: U1.42@1777.18,2526.6 v1(1858.41,2526.6)
  Bottom Layer w10: v1(1858.41,2526.6) 1720.5,2388.69 1720.5,2320.27 1761.77,2279 1883.57,2279 1963.57,2359 2062.7,2359 2074.21,2347.49 J1.4@2119.96,2347.49
FMC_A0: U1.16 U3.23 | length 4099.6
  Top Layer w10: U1.16@1777.18,3038.41 1823.59,3038.41 1843.5,3018.5 v1(1846,3018.5) ; v1(3855,3792.32) 3855,3760 3975,3640 3975,2778 3932.01,2735.01 U3.23@3932.01,2572.44
  Bottom Layer w10: v1(1846,3018.5) 1840.5,3024 1840.5,3105.5 1931.5,3196.5 1931.5,3299 1939,3306.5 1939,3455.38 1962.5,3478.88 1962.5,3534.73 2071.28,3643.52 2500.35,3643.52 2838.83,3982 3682,3982 3756,3908 3756,3891.32 v1(3855,3792.32)
FMC_A1: U1.17 U3.24 | length 5494.8
  Top Layer w10: v1(1698.73,2948.57) 1698.73,2965.59 1681.5,2982.82 1681.5,3006.23 1695.27,3020 1775.91,3020 U1.17@1777.18,3018.72 ; U3.24@3900.51,2572.44 3900.51,2649.51 v1(3901,2650)
  Bottom Layer w10: v1(1698.73,2948.57) 1480,2729.84 1480,2147.37 1815.37,1812 2396,1812 2444,1764 3367,1764 3423,1820 4273,1820 4334,1881 4334,2059 4381,2106 4381,2298 4263,2416 4263,2618.5 4270.5,2626 4270.5,2711.5 4114.13,2711.5 4107.5,2704.87 4107.5,2704.27 4053.23,2650 v1(3901,2650)
FMC_A2: U1.18 U3.25 | length 4393.1
  Top Layer w10: U1.18@1777.18,2999.04 1817.94,2999.04 1908,2908.98 1908,2752 1925,2735 1976,2735 2005.5,2764.5 2005.5,3203.5 v1(1985,3224) ; v1(3855,3612) 3869.02,3597.98 U3.25@3869.02,2572.44
  Bottom Layer w10: v1(1985,3224) 1968,3224 1947.5,3244.5 1947.5,3283.5 1955,3291 1955,3448.75 1978.5,3472.25 1978.5,3492.28 2058.22,3572 2123,3572 2141.5,3590.5 2270.73,3590.5 2356.5,3504.73 2356.5,3480.27 2397.77,3439 2471,3439 2719,3687 3785.43,3687 3855,3617.43 v1(3855,3612)
FMC_A3: U1.19 U3.26 | length 2988.5
  Top Layer w10: U1.19@1777.18,2979.35 1815,2979.35 1891,2903.35 v1(1891,2717) ; v1(1985.47,2644.71) 2024.26,2644.71 2143.98,2764.43 2401.57,2764.43 2483.24,2682.76 2531.98,2682.76 2725,2489.73 2725,2406 2813,2318 v1(2813,2156) ; U3.26@3837.52,2572.44 3837.52,2535.05 3850.14,2522.43 3850.14,2504.86 v1(3852.57,2502.43)
  Bottom Layer w10: v1(1891,2717) 1963.29,2644.71 v1(1985.47,2644.71) ; v1(2813,2156) 3135,2156 3165,2186 3508,2186 3824.43,2502.43 v1(3852.57,2502.43)
FMC_A4: U1.20 U3.29 | length 4224.2
  Top Layer w10: v1(1705,2996.5) 1706.5,2996.5 1743.33,2959.67 U1.20@1777.18,2959.67 ; v1(3358,1722) 3787,2151 3837.52,2151 U3.29@3837.52,2100
  Bottom Layer w10: v1(1705,2996.5) 1701.05,2996.5 1679.05,3018.5 1664,3018.5 1623,2970 1245,2592 1245,2068 1591,1722 v1(3358,1722)
FMC_A5: U1.21 U3.30 | length 4071.1
  Top Layer w10: v1(1648,2963) 1651.07,2963 1689,2925.07 1708.47,2925.07 1723.38,2939.98 U1.21@1777.18,2939.98 ; v1(3418,1748) 3632,1962 3830.02,1962 3869.02,2001 U3.30@3869.02,2100
  Bottom Layer w10: v1(1648,2963) 1261,2576 1261,2204 1673,1792 1905,1792 1949,1748 v1(3418,1748)
FMC_A6: U1.60 U3.31 | length 2460.5
  Top Layer w10: U1.60@2153.78,2405.91 2153.78,2299.78 2122,2268 2122,2098 2104,2080 2062,2080 2054,2072 2054,2010.38 2092.88,1971.5 2324.5,1971.5 v1(2404.5,2051.5) ; v1(3900.51,2025) U3.31@3900.51,2100
  Bottom Layer w10: v1(2404.5,2051.5) 2436.5,2019.5 2525.07,2019.5 2539.07,2033.5 2651.99,2033.5 2667.37,2018.12 3893.63,2018.12 v1(3900.51,2025)
FMC_A7: U1.63 U3.32 | length 2266
  Top Layer w10: U1.63@2212.83,2405.91 2212.83,2243.43 2255,2201.26 v1(2255,1995) ; U3.32@3932.01,2100 3940,2092.01 v1(3940,1990)
  Bottom Layer w10: v1(2255,1995) 2263,1995 2294,2026 2404.5,2026 2427,2003.5 2551.57,2003.5 2565.57,2017.5 2645.36,2017.5 2661.36,2001.5 3928.5,2001.5 v1(3940,1990)
FMC_A8: U1.64 U3.33 | length 2304.1
  Top Layer w10: U1.64@2232.52,2405.91 2232.52,2255.67 2291.57,2196.62 2291.57,2029.66 2316,2005.23 v1(2316,2002) ; U3.33@3963.5,2100 3970,2093.5 3970,1948.23 v1(3978.23,1940)
  Bottom Layer w10: v1(2316,2002) 2330.5,1987.5 2605.27,1987.5 2619.27,2001.5 2638.73,2001.5 2689.23,1951 3967.23,1951 v1(3978.23,1940)
FMC_A9: U1.65 U3.34 | length 2107.4
  Top Layer w10: U1.65@2252.2,2405.91 2252.2,2258.62 2334.82,2176 2406,2176 2438,2144 2438,2101 v1(2440,2099) ; U3.34@3995,2100 4000,2105 3995,2110 v1(3995,2180)
  Bottom Layer w10: v1(2440,2099) 2450,2089 3904,2089 v1(3995,2180)
FMC_A10: U1.66 U3.22 | length 2199.2
  Top Layer w10: U1.66@2271.89,2405.91 2271.89,2265.46 2342.35,2195 v1(2465,2195) ; U3.22@3963.5,2572.44 v1(3963.5,2690)
  Bottom Layer w10: v1(2465,2195) 2471.5,2201.5 2669.48,2201.5 2687.98,2183 3137,2183 3156,2202 3391.73,2202 3879.73,2690 v1(3963.5,2690)
FMC_A11: U1.67 U3.35 | length 2183.4
  Top Layer w10: U1.67@2291.57,2405.91 2291.57,2328.56 2401.64,2218.5 2474.73,2218.5 2488.5,2204.73 2488.5,2058.63 v1(2481.81,2051.93) ; U3.35@4026.5,2100 4039.12,2087.38 4039.12,2007.38 v1(4045,2001.5)
  Bottom Layer w10: v1(2481.81,2051.93) 2496.37,2066.5 3920.5,2066.5 3985.5,2001.5 v1(4045,2001.5)
FMC_A12: U1.106 U3.36 | length 1869.7
  Top Layer w10: v1(2689.83,2700.17) 2684.66,2705.34 2684.66,2796.85 2709.69,2821.87 U1.106@2786.28,2821.87 ; v1(2896,2494) 3072.02,2494 3336.02,2230 4000,2230 4057.99,2172.01 U3.36@4057.99,2100
  Bottom Layer w10: v1(2689.83,2700.17) v1(2896,2494)
FMC_A16_CLE: U1.99 U4.16 | length 2303.6
  Top Layer w9.84: U4.16@3712.6,3702.21 3765.34,3702.21
  Top Layer w10: U1.99@2786.28,2684.08 2921.37,2684.08 2943.63,2661.81 2969.69,2661.81 3003.5,2628 3108.08,2628 3301.08,2435 3535.64,2435 3808.81,2708.18 3808.81,3658.73 3765.34,3702.21
FMC_A17_ALE: U1.100 U4.17 | length 2237.8
  Top Layer w9.84: 3566.52,3682.52 U4.17@3712.6,3682.52
  Top Layer w10: U1.100@2786.28,2703.76 2925.61,2703.76 2948.71,2680.66 2982.84,2680.66 3019.5,2644 3156.1,2644 3345.1,2455 3500,2455 3520,2475 3520,2655 3496,2679 3496,3612 3566.52,3682.52
FMC_BA0: U1.108 U3.20 | length 3018.5
  Top Layer w10: v1(2622,2674) 2622,2827.24 2656,2861.24 U1.108@2786.28,2861.24 ; U3.20@4026.5,2572.44 v1(4026.5,2732)
  Bottom Layer w10: v1(2622,2674) 2544.5,2596.5 2544.5,2468.87 2607.37,2406 2730.5,2406 2760.46,2376.04 2760.46,2330.96 2736,2306.5 2592,2306.5 2578,2320.5 2546,2320.5 2537.5,2312 2537.5,2274 2538.5,2273 2698,2273 2724.5,2246.5 2929.5,2246.5 2940,2236 3339,2236 3835,2732 v1(4026.5,2732)
FMC_BA1: U1.109 U3.21 | length 2399.5
  Top Layer w10: v1(2604,3057) 2604,2932.93 2656,2880.93 U1.109@2786.28,2880.93 ; U3.21@3995,2572.44 3995,2630.7 4003,2638.69 v1(4003,2966.61)
  Bottom Layer w10: v1(2604,3057) 2604,3063.73 2644.27,3104 2690.21,3104 2765.71,3179.5 3016.24,3179.5 3046.74,3210 3241.87,3210 3262.63,3230.76 3892.13,3230.76 4003,3119.89 v1(4003,2966.61)
FMC_D0: U1.104 U3.2 U4.29 | length 3123.2
  Top Layer w9.84: U4.29@4500,3623.47 4555.31,3623.47 4575,3603.78 4575,3492.86 4520,3437.86 4520,2960 4593.43,2886.57
  Top Layer w10: U1.104@2786.28,2782.5 2843.5,2784 2922.45,2784 2952.14,2754.31 2952.14,2720.86 2976.34,2696.66 3298.34,2696.66 v1(3355,2640) ; v1(4590,2750) 4590,2751 v1@4593.43,2754.43 ; U3.2@4593.43,2572.44 v1@4593.43,2754.43 ; 4593.43,2886.57 v1@4593.43,2754.43
  Bottom Layer w10: v1(3355,2640) 3676.5,2640 3788.5,2752 3998.86,2752 4014.86,2768 4066,2768 4090.5,2743.5 4306.83,2743.5 4307.77,2742.56 4340.06,2742.56 4347.5,2750 v1(4590,2750)
FMC_D1: U1.105 U3.4 U4.30 | length 3246.2
  Top Layer w9.84: 4447.84,2932.16 4447.84,3634.99 4456,3643.15 U4.30@4500,3643.15
  Top Layer w10: U1.105@2786.28,2802.19 2943.31,2802.19 2969.69,2775.81 2969.69,2736.6 2991.29,2715 v1(3365,2715) ; 4447.84,2932.16 4530.43,2849.57 v1(4530.43,2644.6) U3.4@4530.43,2572.44
  Bottom Layer w10: v1(3365,2715) 3367,2715 3457,2805 3759,2805 3761.5,2807.5 4565.73,2807.5 4613.5,2759.73 4613.5,2727.67 v1(4530.43,2644.6)
FMC_D2: U1.142 U3.5 U4.31 | length 4477.3
  Top Layer w9.84: 4411,3626.47 4447.37,3662.84 U4.31@4500,3662.84 ; U4.31@4505.84,3663 v1(4582.31,3663)
  Top Layer w10: U1.142@2527.79,3415 2527.79,3943.79 v1(2879,4295) ; 4411,3626.47 4411,2899 4498.94,2811.06 U3.5@4498.94,2572.44
  Bottom Layer w10: v1(2879,4295) 4055,4295 4252,4098 4252,3796.16 4432.16,3616 4535.31,3616 v1(4582.31,3663)
FMC_D3: U1.143 U3.7 U4.32 | length 4903
  Top Layer w9.84: 4371,2746.95 4371,3642.39 4427.13,3698.52 4427.13,3695.39 4440,3682.52 ; v1(4423.48,3682.52) 4440,3682.52 ; U4.32@4500,3682.52 4440,3682.52
  Top Layer w10: U1.143@2508.11,3415 2508.11,4045 2819,4355.89 2819,4512 2842,4535 3275,4535 3324,4486 v1(3352.48,4486) ; 4371,2746.95 4435.95,2682 U3.7@4435.95,2572.44
  Bottom Layer w10: v1(3352.48,4486) 4205.25,4486 4311.5,4379.75 4311.5,4348.5 4414.5,4245.5 4414.5,4207.26 4302,4094.76 4302,3804 v1(4423.48,3682.52)
FMC_D4: U1.68 U3.8 U4.41 | length 5627.6
  Top Layer w9.84: U4.41@4500,3859.69 v1(4582.31,3859.69)
  Top Layer w10: U1.68@2311.26,2405.91 2311.26,2331.51 2404.04,2238.72 2477.14,2238.72 2505.31,2210.56 2505.31,1999.31 2469,1963 2469,1598 v1(2493,1574) ; U3.8@4404.45,2572.44 4405,2571.89 v1(4405,2491)
  Bottom Layer w10: v1(2493,1574) 2788,1574 2833.82,1619.82 2931.57,1619.82 2935.39,1616 4314.33,1616 4444.5,1746.17 4444.5,2303.5 4296.5,2451.5 4296.5,2481.46 4310.27,2495.23 4400.77,2495.23 v1(4405,2491) 4499,2491 4640,2632 4640,3802 v1(4582.31,3859.69)
FMC_D5: U1.69 U3.10 U4.42 | length 3908.8
  Top Layer w9.84: 4363,3893 4433,3893 4446.63,3879.37 U4.42@4500,3879.37
  Top Layer w10: U1.69@2330.94,2405.91 2330.94,2342.36 2418.58,2254.72 2483.76,2254.72 2532,2206.49 v1(2532,2178) ; v1(3960,2440) 4321.51,2440 4344,2462.49 4344,2531.46 4341.46,2534 U3.10@4341.46,2572.44 4341.46,3871.46 4363,3893
  Bottom Layer w10: v1(2532,2178) 2538,2178 2594.13,2121.87 3466.5,2121.87 3784.63,2440 v1(3960,2440)
FMC_D6: U1.70 U3.11 U4.43 | length 5914.5
  Top Layer w9.84: U4.43@4500,3899.06 v1(4640,3899.06)
  Top Layer w10: U1.70@2350.63,2405.91 2350.63,2366.37 v1(2376,2341) ; v1(2369.34,2138) 2369.34,2122.74 2443,2049.09 2443,1568 2501,1510 v1(2910,1510) ; U3.11@4309.96,2572.44 4309.96,2491 4320,2480.96 v1(4320,2471.73)
  Bottom Layer w10: v1(2369.34,2138) 2376,2144.66 v1(2376,2341) ; v1(2910,1510) 2926.62,1526.62 4418.6,1526.62 4509,1617.03 4509,2291.96 4333.46,2467.5 ; v1(4640,3899.06) 4689,3850.06 4689,2650.89 4505.61,2467.5 4333.46,2467.5 ; 4333.46,2467.5 4329.23,2471.73 v1(4320,2471.73) 4324.23,2467.5 4333.46,2467.5
FMC_D7: U1.73 U3.13 U4.44 | length 4492.2
  Top Layer w9.84: 4285.74,3918.74 U4.44@4500,3918.74
  Top Layer w10: U1.73@2409.68,2405.91 2409.68,2365.68 2405,2361 2405,2311.99 2446.27,2270.72 2490.39,2270.72 2555.5,2205.62 2555.5,1933.5 v1(2542,1920) ; U3.13@4246.97,2572.44 4246.97,2656.03 v1(4231,2672) 4229,2674 4229,3862 4285.74,3918.74
  Bottom Layer w10: v1(2542,1920) 2560.5,1901.5 3978.23,1901.5 4176,2099.27 4176,2617 v1(4231,2672)
FMC_D8: U1.74 U3.42 | length 2848.5
  Top Layer w10: v1(2429.37,2341) U1.74@2429.37,2405.91 ; v1(4230.97,2001) 4246.97,2017 U3.42@4246.97,2100
  Bottom Layer w10: v1(2429.37,2341) 2400.5,2312.13 2400.5,2115 2383.5,2098 2268,2098 2205,2035 2205,1930 2266.5,1868.5 4098.47,1868.5 v1(4230.97,2001)
FMC_D9: U1.75 U3.44 | length 2450.6
  Top Layer w10: U1.75@2449.05,2405.91 2449.05,2448 2481.05,2480 v1(2505,2480) ; v1(3503,2352) 4249.96,2352 4309.96,2292 U3.44@4309.96,2100
  Bottom Layer w10: v1(2505,2480) 2500.5,2475.5 2500.5,2254.99 2537.49,2218 2862.5,2218 2881,2199.5 3084.5,2199.5 3103,2218 3369,2218 v1(3503,2352)
FMC_D10: U1.76 U3.45 | length 3103.7
  Top Layer w10: v1(2456,2294.22) 2468.74,2306.96 U1.76@2468.74,2405.91 ; U3.45@4341.46,2100 v1(4341.46,2238)
  Bottom Layer w10: v1(2456,2294.22) 2456,2292.51 2416.5,2253.01 2416.5,2097.5 2390.94,2071.94 2272.47,2071.94 2230.2,2029.66 2230.2,1929.6 2275.3,1884.5 4064.5,1884.5 4128,1948 4128,2024.54 v1(4341.46,2238)
FMC_D11: U1.77 U3.47 | length 2859.4
  Top Layer w10: U1.77@2488.42,2405.91 2488.42,2321 2579.48,2229.95 2579.48,1706.48 v1(2568,1695) ; U3.47@4404.45,2100 4405,2099.45 v1(4405,2021.95)
  Bottom Layer w10: v1(2568,1695) 3525,1695 3633.67,1803.67 4281.14,1803.67 4359,1881.52 4359,1943.5 4405,1989.5 v1(4405,2021.95)
FMC_D12: U1.78 U3.48 | length 3624.2
  Top Layer w10: U1.78@2508.11,2405.91 2508.11,2365.89 2524,2350 v1(2524,2340) ; v1(2633,1549) 2633,1867 2681,1915 2681,2222 v1(2654,2249) ; U3.48@4435.95,2100 4435.95,2188.95 v1(4476,2229)
  Bottom Layer w10: v1(2524,2340) 2524,2339 2521.5,2336.5 2521.5,2256.62 2646.38,2256.62 v1(2654,2249) ; v1(2633,1549) 2639,1555 2806.28,1555 2855.09,1603.82 2915.57,1603.82 2933.89,1585.5 4370.5,1585.5 4461.97,1676.97 4461.97,2048.86 4476,2062.88 v1(4476,2229)
FMC_D13: U1.96 U3.50 | length 2047
  Top Layer w10: U1.96@2786.28,2625.02 2854.98,2625.02 2868,2612 2912.01,2612 2929.51,2594.5 2948.5,2594.5 2963,2580 3035,2580 3230.5,2384.5 4412.5,2384.5 4500,2297 4500,2170.06 4498.94,2169 U3.50@4498.94,2100
FMC_D14: U1.97 U3.51 | length 2087.9
  Top Layer w10: U1.97@2786.28,2644.71 2901.94,2644.71 2936.14,2610.5 2964.5,2610.5 2979,2596 3075.2,2596 3270.7,2400.5 4431.5,2400.5 4530.43,2301.57 U3.51@4530.43,2100
FMC_D15: U1.98 U3.53 | length 2162.5
  Top Layer w10: U1.98@2786.28,2664.39 2914.25,2664.39 2952.14,2626.5 2973,2626.5 2987.5,2612 3095.6,2612 3291.1,2416.5 4484.5,2416.5 4593.43,2307.57 U3.53@4593.43,2100
FMC_NBL0: U1.169 U3.15 | length 3970.9
  Top Layer w10: U1.169@1996.3,3415 1996.3,3464.82 2039.35,3507.88 2039.35,3578.35 v1(2069,3608) ; v1(3850,3685) 3850,3655 3831.5,3636.5 3831.5,2708.23 3751.5,2628.23 3751.5,2548.5 3835,2465 4120.98,2465 4183.98,2528 U3.15@4183.98,2572.44
  Bottom Layer w10: v1(2069,3608) 2517,3608 2835.3,3926.3 3641.04,3926.3 3680,3887.34 3680,3853.03 3848.03,3685 v1(3850,3685)
FMC_NBL1: U1.170 U3.39 | length 6851.6
  Top Layer w10: U1.170@1976.61,3415 1978.5,3416.89 1978.5,3474.01 2023.35,3518.86 2023.35,3619.74 2047.13,3643.52 2047.13,3792.92 2405,4150.79 2405,4549 2503,4647 v1(3573,4647) ; U3.39@4152.48,2100 4146,2062.52 4146,2016 4187,1975 4645,1975 v1(4770,2100)
  Bottom Layer w10: v1(3573,4647) 4446,4647 4770,4323 v1(4770,2100)
FMC_NCE3: R17.2 U1.152 U4.9 | length 2593.2
  Top Layer w9.84: v1(3641.04,3840) U4.9@3712.6,3840 4108,3840
  Top Layer w10: U1.152@2330.94,3415 2330.94,3459 2300.5,3489.44 2300.5,3530.5 v1(2351,3581) ; 4108,3840 4140,3808 R17.2@4140,3400
  Bottom Layer w10: v1(2351,3581) 2516.59,3581 2839.16,3903.56 3617.56,3903.56 3641.04,3880.09 v1(3641.04,3840)
FMC_NE1: J1.35 U1.151 | length 1037.7
  Top Layer w10: v1(2324,3504) 2350.63,3477.37 U1.151@2350.63,3415
  Bottom Layer w10: J1.35@2305,3040.4 2264,3040.4 2238.07,3066.33 2238.07,3138.93 2116.5,3260.5 2065,3260.5 2023.35,3302.15 2023.35,3491.88 2047.13,3515.66 2312.34,3515.66 v1(2324,3504)
FMC_NOE: U1.146 U4.8 | length 1914.8
  Top Layer w9.84: U4.8@3712.6,3859.69 3760,3859.69 3798,3897.69 v1(3798,3913.84)
  Top Layer w10: U1.146@2449.05,3415 v1(2449.05,3682.05)
  Bottom Layer w10: v1(2449.05,3682.05) 2784,4017 3694.84,4017 v1(3798,3913.84)
FMC_NWAIT: U1.150 U4.7 | length 1572.9
  Top Layer w9.84: v1(3612.6,3875.3) v1@3616.67,3879.37 ; 3660.37,3879.37 U4.7@3712.6,3879.37
  Top Layer w10: U1.150@2370.31,3415 2370.31,3480.31 v1(2380,3490) ; v1@3616.67,3879.37 3660.37,3879.37
  Bottom Layer w10: v1(2380,3490) 2493,3490 2794,3791 3451,3791 3535.3,3875.3 v1(3612.6,3875.3)
FMC_NWE: U1.147 U4.18 | length 1623.2
  Top Layer w9.84: U4.18@3712.6,3662.84 3716.44,3658.99 3775.32,3658.99 v1(3785.31,3649)
  Top Layer w10: v1(2429.37,3350) U1.147@2429.37,3415
  Bottom Layer w10: v1(2429.37,3350) 2537,3350 2728.75,3541.75 3647.91,3541.75 3755.16,3649 v1(3785.31,3649)
FMC_SDCKE0: U1.35 U3.37 | length 4658.3
  Top Layer w10: v1(1205,2058) 1205,2537 1369,2701 1647.23,2701 1683.84,2664.39 U1.35@1777.18,2664.39 ; v1(3927,1656) 3993.5,1722.5 3993.5,1916.77 4089.49,2012.75 U3.37@4089.49,2100
  Bottom Layer w10: v1(1205,2058) 1318,1945 1318,1733 1395,1656 v1(3927,1656)
FMC_SDCLK: U1.112 U3.38 | length 2006
  Top Layer w10: v1(2719,2940) U1.112@2786.28,2939.98 ; v1(2951,2546.73) 3041.92,2546.73 3307.65,2281 4100.98,2281 4120.98,2261 U3.38@4120.98,2100
  Bottom Layer w10: v1(2719,2940) 2767,2892 2767,2776 2951,2592 v1(2951,2546.73)
FMC_SDNCAS: U1.160 U3.17 | length 3575.8
  Top Layer w10: U1.160@2173.46,3415 2172.89,3384.42 2172.89,2975.54 2368,2780.43 2456.57,2780.43 v1(2478,2759) ; v1(4115,2645) 4115,2648.03 4118.43,2651.46 4120.98,2648.91 U3.17@4120.98,2572.44
  Bottom Layer w10: v1(2478,2759) 2478,2305.46 2479.5,2303.96 2479.5,2256.5 2440.84,2217.84 2440.84,2167.66 2503.5,2105 3516,2105 3585,2174 3852,2174 4115,2437 v1(4115,2645)
FMC_SDNE0: R19.2 U1.34 U3.19 | length 6334.4
  Top Layer w10: v1(1181,2592) 1308,2719 1663.36,2719 1701.86,2680.5 1747.42,2680.5 1751,2684.08 U1.34@1777.18,2684.08 ; U3.19@4057.99,2572.44 4057.99,2687.99 v1(4084,2714) 4120.06,2750.06 R19.2@4180,2750.06
  Bottom Layer w10: v1(1181,2592) 1181,1776 1375,1582 2450,1582 2503.82,1635.82 2947.57,1635.82 2951.39,1632 4138,1632 4428.5,1922.5 4428.5,2279.7 4279.29,2428.91 4279.29,2538 4328.5,2587.21 4328.5,2674 4286.5,2716 4286.5,2727.5 4107.5,2727.5 4089,2709 v1(4084,2714)
FMC_SDNRAS: U1.59 U3.18 | length 3979.7
  Top Layer w10: v1(2094,2117) 2094,2262.91 2134.09,2303 U1.59@2134.09,2405.91 ; v1(4089.49,2495) 4089.49,2571.93 U3.18@4090,2572.44
  Bottom Layer w10: v1(2094,2117) 2094,1961.5 2203,1852.5 4179.5,1852.5 4255,1928 4255,2062.79 4364.96,2172.75 4364.96,2248.04 4243,2370 4243,2645 4254.5,2656.5 4254.5,2681.73 4240.73,2695.5 4127.27,2695.5 4089.49,2657.72 v1(4089.49,2495)
FMC_SDNWE: U1.32 U3.16 | length 4066.3
  Top Layer w10: U1.32@1777.18,2723.45 1810.55,2723.45 1869.61,2664.39 v1(1871.96,2664.39) ; v1(3152,1817) 3535,2200 v1(3940,2200) ; U3.16@4152.48,2572.44 4152.48,2627.04 4160,2634.56 v1(4160,2645)
  Bottom Layer w10: v1(1871.96,2664.39) 1744.39,2664.39 1656,2576 1656,2252 1828,2080 1828,1848 1839.5,1836.5 2990.5,1836.5 3010,1817 v1(3152,1817) ; v1(3940,2200) 4160,2420 v1(4160,2645)
GBC_KEY: J1.15 U1.13 | length 663.5
  Top Layer w10: U1.13@1777.18,3097.46 1838.74,3097.46 1861.79,3074.41 1877.09,3074.41 1908.33,3043.17 1908.33,3005.15 1937.5,2975.98 1937.5,2762.03 v1(1934.5,2759.03)
  Bottom Layer w10: v1(1934.5,2759.03) 1945.33,2748.2 1979.37,2748.2 2033.63,2693.95 J1.15@2119.96,2693.95
GBC_LED: J1.45 U1.50 | length 1032.2
  Top Layer w10: U1.50@1956.93,2405.91 1956.93,2289.07 v1(1973,2273)
  Bottom Layer w10: v1(1973,2273) 1973,2222 2000,2195 2056.5,2195 2088.68,2227.18 2155.52,2227.18 2164.43,2236.09 2164.43,2711.87 2178,2725.44 J1.45@2305,2725.44